# Altium PCB PCB6.PcbDoc
Units mm, origin at the board's own origin, x right, y up, seen from the top; angles counter-clockwise.
Board outline 152.4 x 101.6 mm, 2 copper layers (Top Layer, Bottom Layer); 45 components, 30 nets, 128 pads, 21 vias.
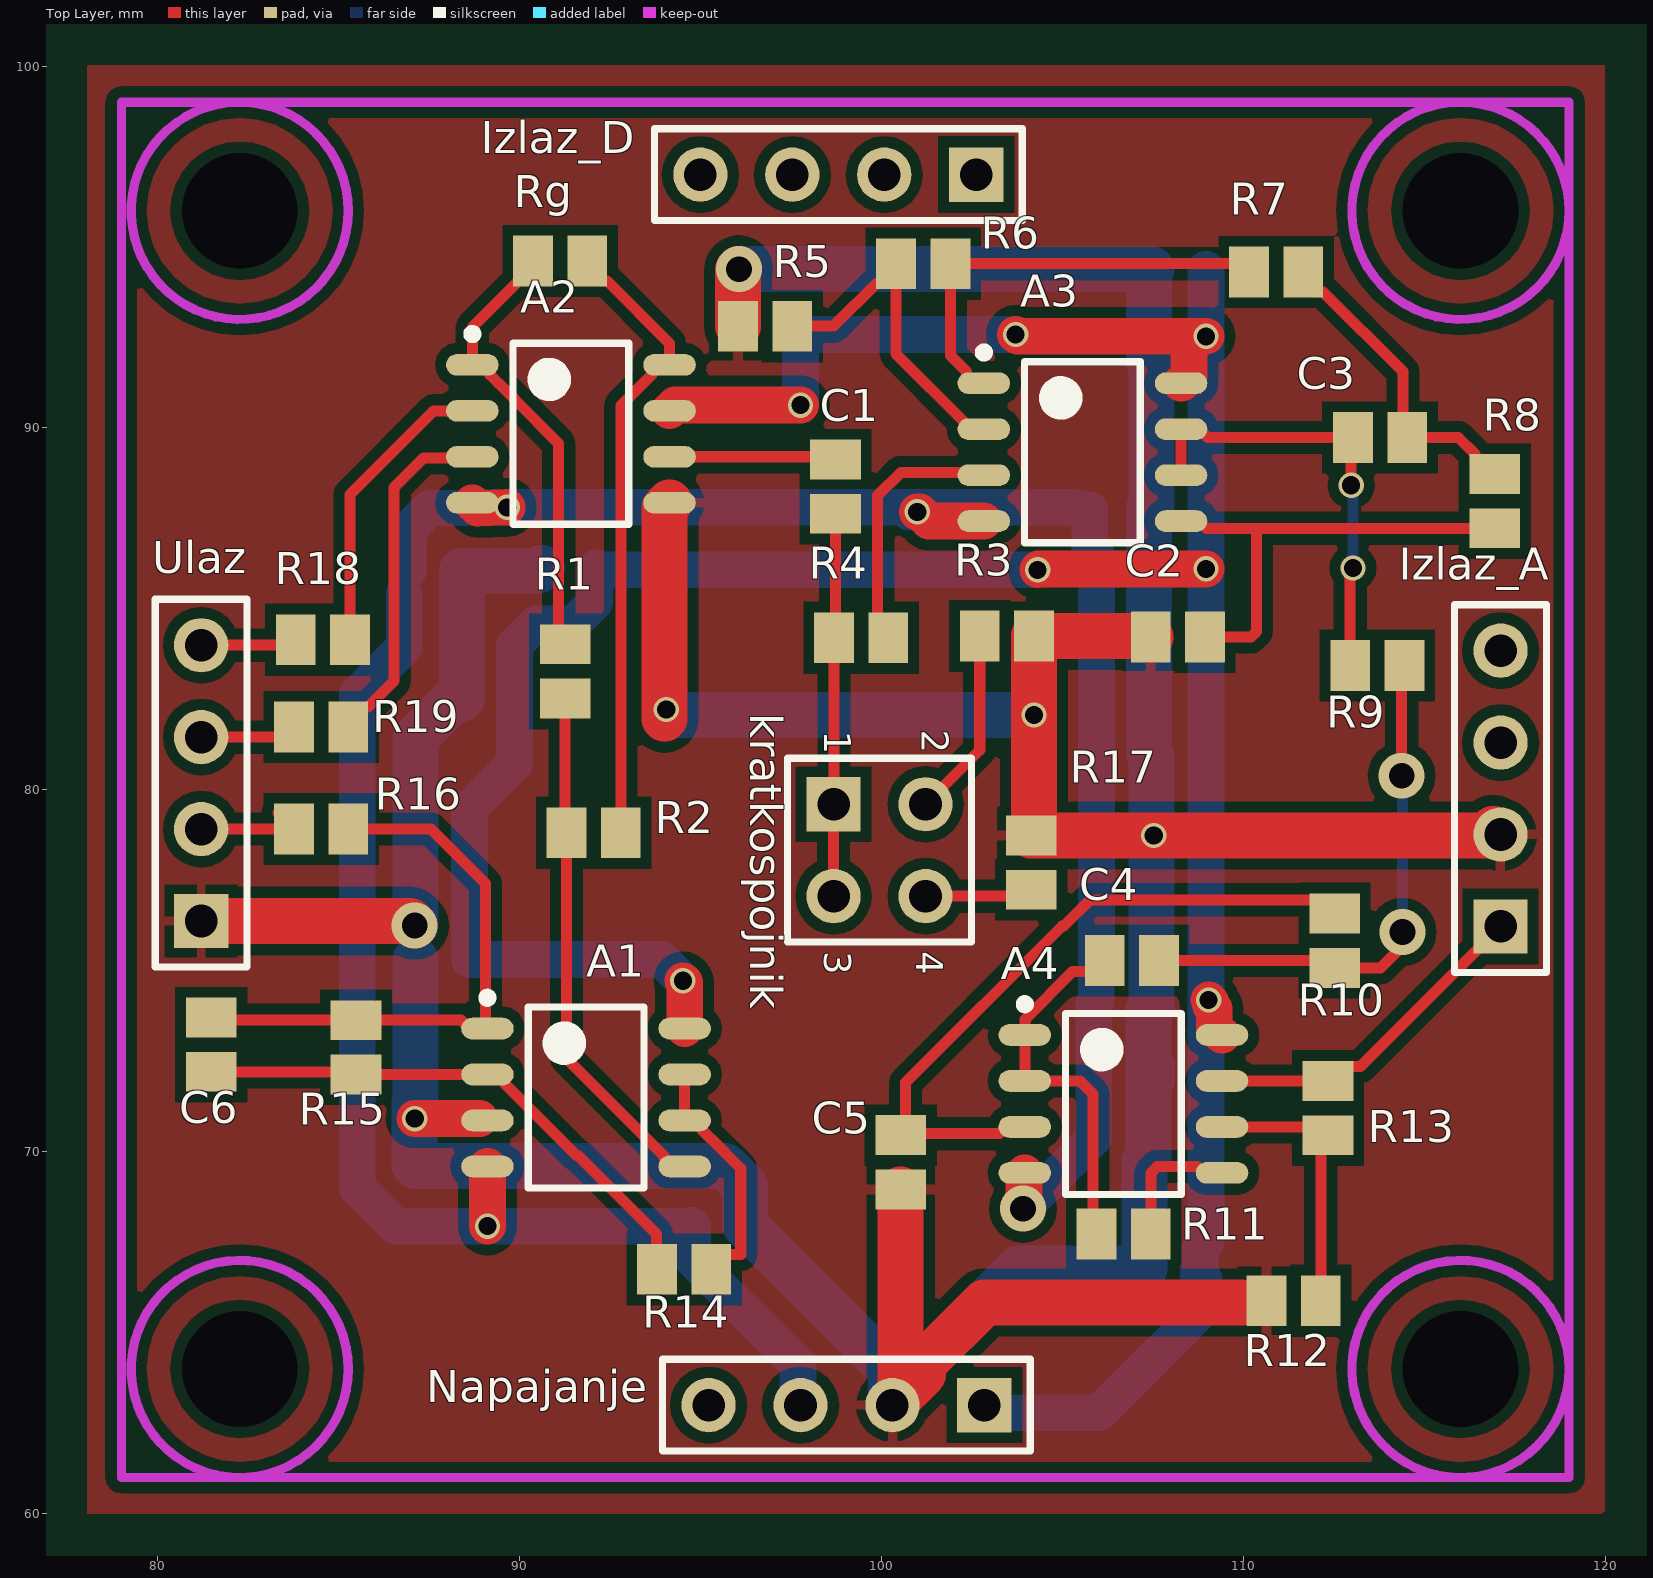
[diagram p0: Top Layer view]
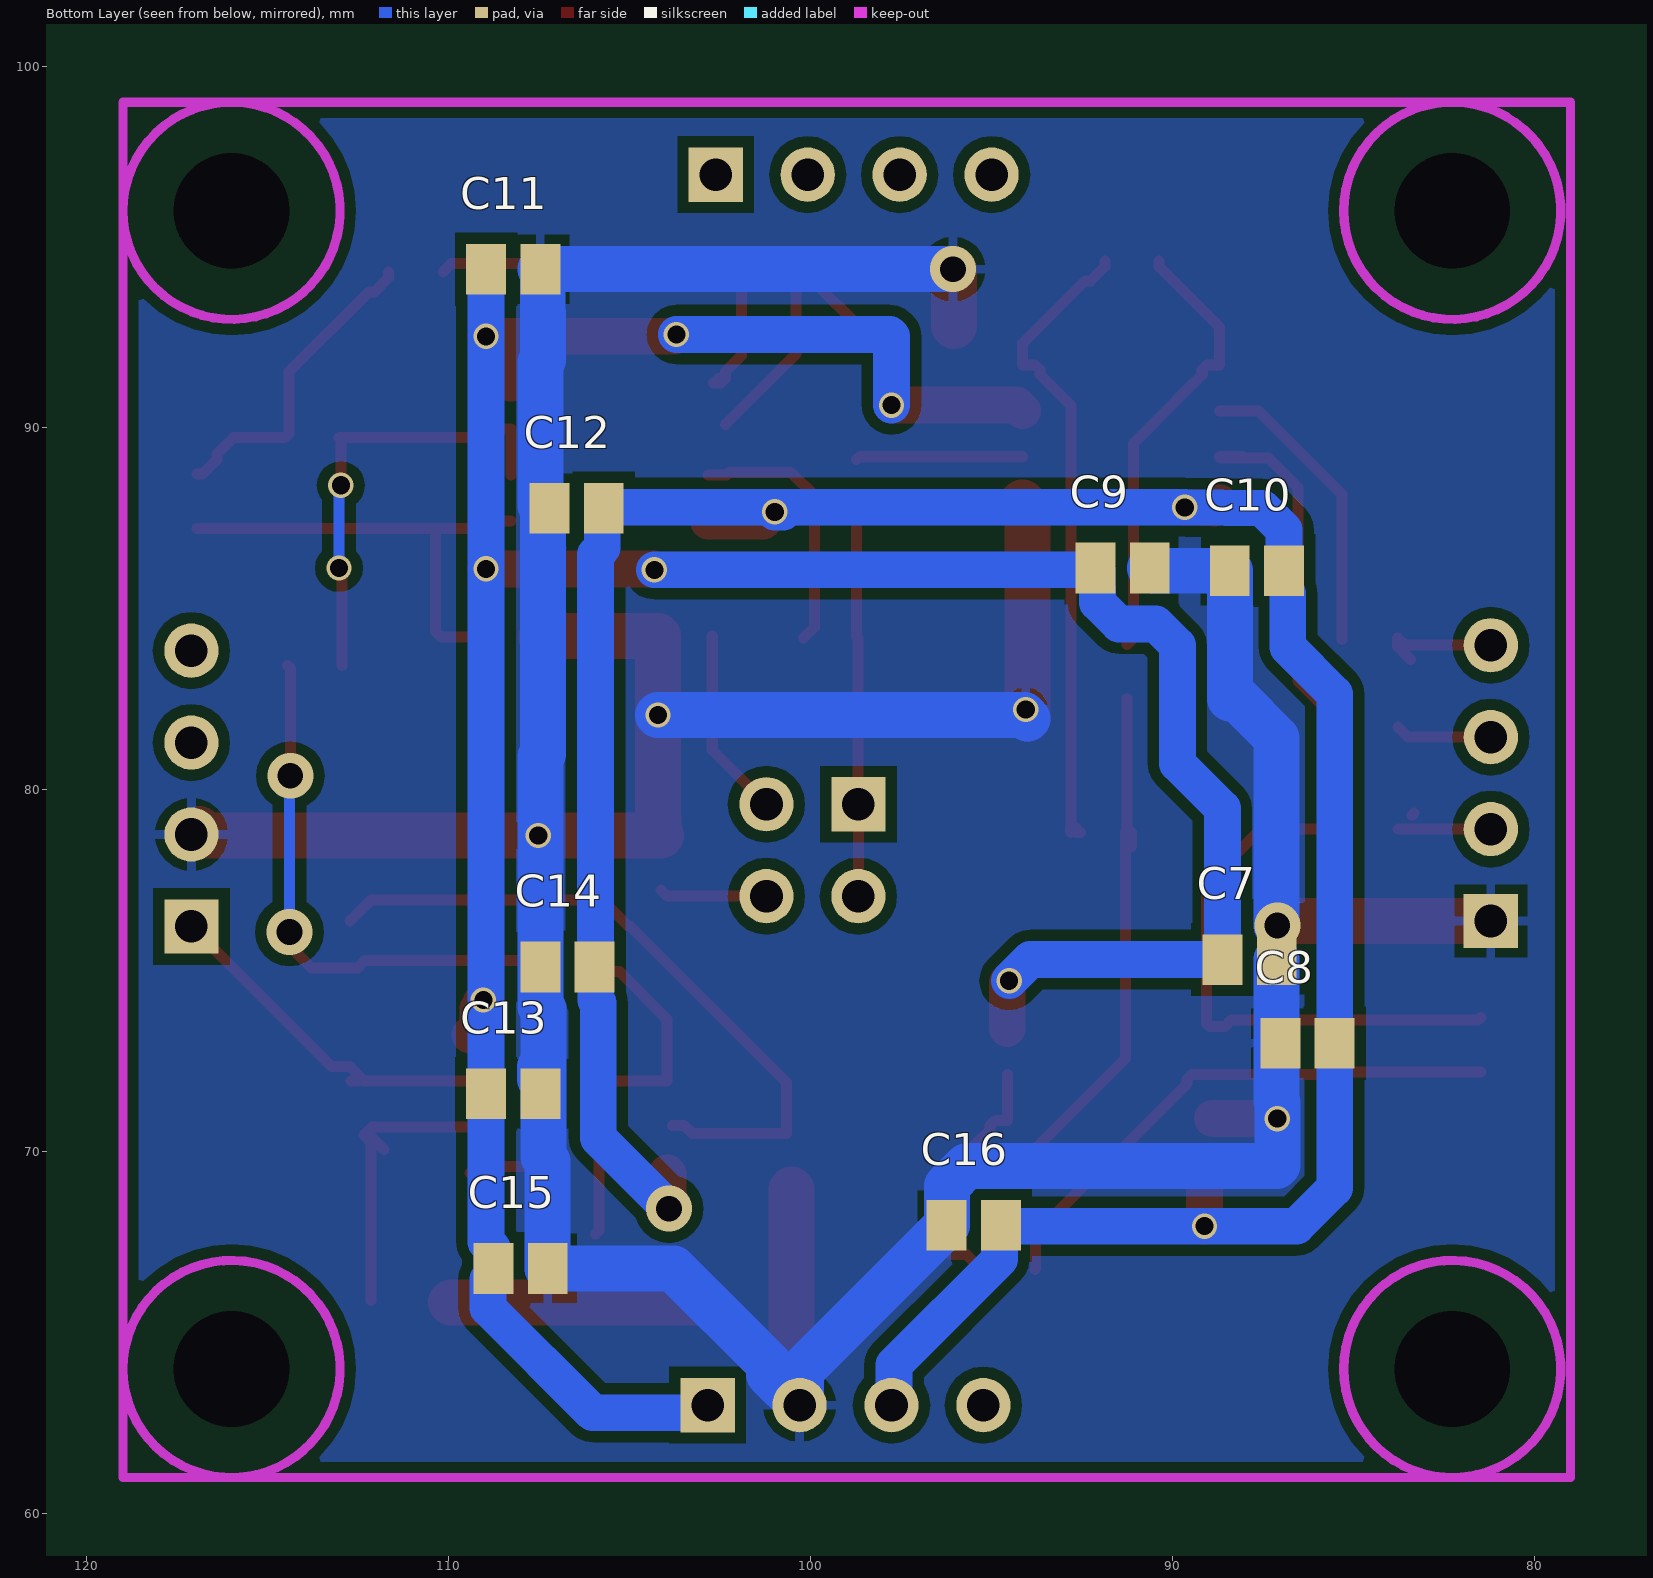
[diagram p1: Bottom Layer view, seen from below]

## Layer stack, top to bottom
Top Solder: solder mask 0.0102, Solder Resist, Dk 3.5
Top Layer: signal copper 0.0356
Dielectric 1: dielectric 0.32, FR-4, Dk 4.8
Bottom Layer: signal copper 0.0356
Bottom Solder: solder mask 0.0102, Solder Resist, Dk 3.5

## Board outline
25.4,25.4 177.8,25.4 177.8,127 25.4,127

## Design rules (kind name [scope] priority, off if disabled: settings)
Clearance [All] p1: gap=0.305 ignorepadtopadclearanceinfootprint=FALSE
HoleSize [All] p1: absolutevalues=TRUE maxlimit=3.2 minlimit=0.025 maxpercent=80.000 minpercent=20.000
MinimumSolderMaskSliver [All] p1: minsoldermaskwidth=0.102
PolygonConnect [All] p1: connectstyle=Relief reliefconductorwidth=0.254 reliefentries=4 polygonreliefangle="90 Angle" airgapwidth=0.254
RoutingVias [All] p1: holewidth=0.711 width=1.27 viastyle="Through Hole" minholewidth=0.711 minwidth=1.27 maxholewidth=0.711 maxwidth=1.27
SilkToSolderMaskClearance [IsPad] p1: minsilkscreentomaskgap=0.102 clearancetoexposedcopper=TRUE
SolderMaskExpansion [All] p1: expansion=0.102
Width [All] p1: maxlimit=1.524 minlimit=0.305 preferedwidth=0.305 minimp=50.000000 maximp=50.000000 favimp=50.000000
27 further rules are at their usual default settings.

## Classes and differential pairs
component class "shema_projekt kor4": A1 A2 A3 A4 C1 C2 C3 C4 C5 C6 Izlaz_A Izlaz_D kratkospojnik R1 R2 R3 R4 R5 R6 R7 R8 R9 R10 R11 R12 R13 R14 R15 R16 R17 R18 Rg Ulaz
component class napajanje: C7 C8 C9 C10 C11 C12 C13 C14 C15 C16 Napajanje

## Components (designator, comment, footprint, x,y, rotation, side; value= is the part's Value field where it differs from the comment)
A1 "MC33172" SOIC127P600X175-8N 108.189,60.071 r0 top
A2 "INA 118" SOIC127P600X175-8N 107.772,78.41 r0 top
A3 "OPA2277" SOIC127P600X175-8N 121.905,77.902 r0 top
A4 "OPA2277" SOIC127P600X175-8N 123.037,59.893 r0 top
C1 "3,3u" C0805 98.73,88.379 r270 top value=100pF
C2 "68n" C0805 108.191,84.226 r180 top value=100pF
C3 "470n" C0805 113.779,89.738 r0 top value=100pF
C4 "82nF" C0805 106.922,75.286 r180 top value=100pF
C5 "68n" C0805 100.533,69.711 r270 top value=100pF
C6 "68n" C0805 81.483,72.961 r270 top value=100pF
C7 "100n" C0805 87.872,75.311 r0 bottom value=100pF
C8 "100n" C0805 86.27,73 r0 bottom value=100pF
C9 "100n" C0805 91.377,86.131 r0 bottom value=100pF
C10 "100n" C0805 87.667,86.055 r0 bottom value=100pF
C11 "100n" C0805 108.216,94.386 r0 bottom value=100pF
C12 "100n" C0805 106.463,87.782 r0 bottom value=100pF
C13 "100n" C0805 108.217,71.603 r0 bottom value=100pF
C14 "100n" C0805 106.717,75.108 r0 bottom value=100pF
C15 "1u" C0805 108.014,66.777 r180 bottom
C16 "1u" C0805 95.492,67.97 r180 bottom
Izlaz_A "Input" HDR1X4 117.108,76.228 r90 top (schematic designator X2)
Izlaz_D "Input" HDR1X4 102.62,97 r180 top (schematic designator X3)
kratkospojnik "kratkospojnik" HDR2X2 98.679,79.604 r270 top (schematic designator jumper)
Napajanje "Input" HDR1X4 102.845,63 r180 top (schematic designator X4)
R1 "866k" C0805 91.262,83.273 r90 top value=1K
R2 "866k" C0805 92.05,78.816 r180 top value=1K
R3 "1M" C0805 103.468,84.252 r0 top value=1K
R4 "1k" C0805 99.441,84.201 r0 top value=1K
R5 "1k" C0805 96.787,92.812 r0 top value=1K
R6 "9k" C0805 101.156,94.539 r0 top value=1K
R7 "5k23" C0805 110.908,94.31 r0 top value=1K
R8 "6k65" C0805 116.948,87.979 r90 top value=1K
R9 "11k8" C0805 113.702,83.439 r180 top value=1K
R10 "16k9" C0805 112.522,75.832 r90 top value=1K
R11 "1k" C0805 106.693,67.73 r0 top value=1K
R12 "1k" C0805 111.391,65.888 r180 top value=1K
R13 "19k" C0805 112.339,71.208 r90 top value=1K
R14 "12k7" C0805 94.551,66.751 r0 top value=1K
R15 "866k" C0805 85.484,72.886 r270 top value=1K
R16 "499k" C0805 84.519,78.918 r180 top value=1K
R17 "100k" C0805 104.14,77.99 r90 top value=1K
R18 "100k" C0805 84.569,84.15 r180 top value=1K
R19 "100k" C0805 84.519,81.737 r0 top value=1K
Rg "12k5" C0805 91.122,94.615 r0 top value=1K
Ulaz "Input" HDR1X4 81.203,76.378 r90 top (schematic designator Input)

## Footprints (in the part's own frame and the unit in brackets; to place one, negate y for a bottom-side part, rotate by r counter-clockwise, add the part's x,y. Pads: shape width x height; smd on the part's side, far side on the other; paste and mask are expansions set on the pad)
C0805 [mm] "Chip Capacitor, Body 2.0x1.3mm, IPC High Density"
  rect 1.1x1.4 smd: 1(-0.75,0) 2(0.75,0)
  body extent -1.1,-0.72 1.1,0.72, height 1.4
HDR1X4 [mm] "Connector; Header; 4 Position"
  rect 1.5x1.5 hole 0.9: 1(0,0)
  round 1.5 hole 0.9: 2(2.54,0) 3(5.08,0) 4(7.62,0)
  silkscreen extent -1.27,-1.27 8.89,1.27
HDR2X2 [mm] "Connector; Header; 2x2 Position"
  rect 1.5x1.5 hole 0.9: 1(0,0)
  round 1.5 hole 0.9: 2(0,2.54) 3(2.54,0) 4(2.54,2.54)
  silkscreen extent -1.27,-1.27 3.81,3.81
SOIC127P600X175-8N [mm] "SOIC, 8-Leads, Body 4,90x3,90mm, Pitch 1,27mm, IPC Medium Density"
  oval 1.45x0.6 smd: 1(-19.075,13.335) 2(-19.075,12.065) 3(-19.075,10.795) 4(-19.075,9.525) 5(-13.625,9.525) 6(-13.625,10.795) 7(-13.625,12.065) 8(-13.625,13.335)
  silkscreen extent -19.2,8.93 -14.75,14.31, body extent -19.35,8.93 -13.35,13.93, height 1.75

## Part data
A1: library part OPA2333, cijena [L]=0.864, Kat.broj=2844927
A2: library part "INA 333", cijena [L]=3.64, Kat.broj=2507235
C1 C2 C3 C4 C5 C6 C7 C8 C9 C10 C11 C12 C13 C14: library part Cap, "Capacitor", LatestRevisionDate=17-Jul-2002, LatestRevisionNote="Re-released for DXP Platform.", PackageDescription="Radial Cap, Thru-Hole; 2 Leads; 0.3 in Pin Spacing", PackageReference=RAD-0.3, Published=8-Jun-2000, Publisher="Altium Limited"
  C1: cijena [L]=0.308, Kat.broj=1759412
  C2 C5 C6: cijena [L]=0.0442, Kat.broj=1759262
  C3: cijena [L]=0.112, Kat.broj=1759148
  C4: cijena [L]=0.0651, Kat.broj=1759264
  C7 C8 C9 C10 C11 C12 C13 C14: cijena [L]=0.146, Kat.broj=1301717
C15 C16: library part elko, cijena [L]=0,521, Kat.broj=1658211
Izlaz_A Izlaz_D Napajanje Ulaz: library part "Header 4H", "Header, 4-Pin, Right Angle", cijena [L]=1.38, Kat.broj=2554950, LatestRevisionDate=17-Jul-2002, LatestRevisionNote="Re-released for DXP Platform.", Publisher="Altium Limited"
kratkospojnik: library part "Header 2X2", "Header, 2-Pin, Dual row", LatestRevisionDate=17-Jul-2002, LatestRevisionNote="Re-released for DXP Platform.", Publisher="Altium Limited"
R1 R2 R3 R4 R5 R6 R7 R8 R9 R10 R11 R12 R13 R14 R15 R16 R17 R18 R19 Rg: library part Res2, "Resistor", LatestRevisionDate=17-Jul-2002, LatestRevisionNote="Re-released for DXP Platform.", PackageDescription="Axial Device, Thru-Hole; 2 Leads; 0.4 in Pin Spacing", PackageReference=AXIAL-0.4, Published=8-Jun-2000, Publisher="Altium Limited"
  R1 R2 R15: cijena [L]=0.0081, Kat.broj=2447731
  R3: cijena [L]=0.034, Kat.broj=1576507
  R4 R5 R11 R12: cijena [L]=0.0046, Kat.broj=2688819
  R6: cijena [L]=0.36, Kat.broj=1160198
  R7: cijena [L]=0.0718, Kat.broj=2312278
  R8: cijena [L]=0.0349, Kat.broj=2138965
  R9: cijena [L]=0.0268, Kat.broj=2138981
  R10: cijena [L]=0.026, Kat.broj=1652926
  R13: cijena [L]=0.026, Kat.broj=1692532
  R14: cijena [L]=0.026, Kat.broj=1469868
  R16: cijena [L]=0.0264, Kat.broj=1653008
  R17: cijena [L]=0.0015, Kat.broj=2446868
  R18 R19: cijena [L]=0.0264, Kat.broj=1469860RL
  Rg: cijena [L]=0.0138, Kat.broj=1469867
A3 A4: cijena [L]=3.69, Kat.broj=1234768

## Free pads (board coordinates)
  round 3 hole 3.2: 0(82.271,64) 0(82.271,96) 0(116,64) 0(116,96)

## Via types
v1: diameter 0.7, hole 0.5, Top Layer to Bottom Layer, 16 vias
v2: diameter 1.27, hole 0.711, Top Layer to Bottom Layer, 5 vias

## Nets (pads, with @x,y where several pads share a name; then routed paths per layer and width w, separated by ;. In a path a pad name is that pad's centre, name@x,y a point inside that pad or via, vN(x,y) a via of type N, cw(c..) or ccw(c..) an arc to the next point about the centre after c; other vN are vias at no path point)
AGND: A1.3 A2.5 C2.2 C5.2 C7.1 C8.2 C9.1 C10.2 C11.1 C12.2 C13.1 C14.2 C15.2 C16.1 Izlaz_A.2 Napajanje.2 R3.2 R5.1 R12.2 R17.2 Ulaz.1 | length 148
  Top Layer w1.016: v1(87.105,70.917) A1.3@88.897,70.917
  Top Layer w1.27: Ulaz.1 86.978,76.378 v2(87.105,76.251) ; v1@94.005,81.966 94.005,87.793 A2.5 ; R5.1 96.037,94.361 v2(96.063,94.386) ; Napajanje.2 Napajanje.2@100.305,63.009 ; C5.2 100.533,63.291 100.305,63.062 Napajanje.2@100.305,63.009 ; C2.2 107.415,84.252 R3.2 v1(104.218,82.067) 104.218,79.17 104.205,79.157 104.205,78.805 R17.2 v1(107.526,78.74) 116.718,78.74 116.896,78.918 117.046,78.768 Izlaz_A.2 ; 109.931,65.837 102.852,65.837 101.155,64.139 101.155,63.859 Napajanje.2@100.305,63.009
  Bottom Layer w1.27: C7.1 87.122,71.383 87.105,71.366 v1(87.105,70.917) 87.105,69.637 87.132,69.61 95.681,69.61 96.232,69.06 96.232,67.981 C16.1 100.261,63.952 100.261,63.044 Napajanje.2 100.305,63.009 101.155,63.859 101.155,64.139 103.792,66.777 C15.2 107.264,69.733 107.382,69.851 C13.1@107.382,71.915 ; v2@87.122,76.251 87.122,81.43 88.215,82.523 ; 88.417,82.523 C10.2 90.531,86.055 90.607,86.131 C9.1 ; v1@94.005,81.966 94.107,82.067 v1(104.218,82.067) ; v2@96.241,94.386 C11.1 107.401,94.321 107.401,93.193 107.393,93.185 107.393,91.88 107.466,91.806 107.466,87.856 107.393,87.782 107.393,80.998 107.467,80.923 C14.2 107.457,75.098 107.457,74.019 107.382,73.944 C13.1@107.382,71.915 ; 107.478,72.339 107.478,72.01 C13.1@107.382,71.915
  other v1: 94.056,82.22
NetA1_1: A1.1 C6.1 R15.1 R16.1 | length 16
  Top Layer w0.305: C6.1 81.558,73.636 R15.1 88.379,73.636 88.553,73.462 88.982,73.462 89.062,73.542 89.062,77.409 87.554,78.918 R16.1
NetA1_2: A1.2 C6.2 R14.1 R15.2 | length 15.2
  Top Layer w0.305: C6.2 85.41,72.211 R15.2 A1.2 89.459,72.136 89.596,72 89.596,71.872 89.845,71.623 89.853,71.623 91.575,69.901 91.618,69.901 93.789,67.73 93.789,66.763 R14.1
NetA1_5: A1.5 R1.1 R2.2 | length 14.8
  Top Layer w0.305: R2.2@91.134,78.435 R2.2@91.134,78.816 ; R2.2@91.217,78.899 91.262,78.945 R1.1 ; R2.2 91.3,72.581 93.992,69.889 93.992,69.823 94.219,69.596 A1.5
NetA1_6: A1.6 A1.7 R14.2 | length 6.8
  Top Layer w0.305: A1.7 A1.6 94.909,70.866 95.046,70.73 95.046,70.602 95.295,70.353 95.303,70.353 96.114,69.542 96.114,67.156 95.698,67.156 95.301,66.758 R14.2
NetA2_1: A2.1 R1.2 Rg.1 | length 12.6
  Top Layer w0.305: Rg.1 90.372,94.465 88.697,92.79 A2.1 89.042,91.745 89.178,91.608 89.178,91.481 89.427,91.232 89.435,91.232 89.879,90.788 89.879,90.78 91.084,89.576 91.084,84.202 R1.2
NetA2_2: A2.2 R18.1 | length 8.3
  Top Layer w0.305: R18.1 85.319,88.163 87.63,90.475 A2.2
NetA2_3: A2.3 R19.2 | length 10.4
  Top Layer w0.305: R19.2 85.269,81.887 85.667,82.285 85.817,82.285 86.538,83.006 86.538,88.355 87.351,89.169 88.661,89.169 A2.3 A2.3@88.071,89.205
NetA2_6: A2.6 C1.1 | length 4.6
  Top Layer w0.305: A2.6 98.654,89.205 C1.1
NetA2_8: A2.8 R2.1 Rg.2 | length 18
  Top Layer w0.305: Rg.2 91.872,94.465 92.269,94.067 92.419,94.067 94.147,92.34 A2.8 93.802,91.745 93.665,91.608 93.665,91.481 93.416,91.232 93.408,91.232 92.8,90.623 R2.1 92.825,78.842 R2.1@92.825,78.943 ; R2.1@92.546,78.816 R2.1@92.659,78.93 ; R2.1@92.659,78.816 R2.1@92.659,78.93 ; R2.1@92.673,78.943 R2.1@92.659,78.93
NetA3_1: A3.1 R6.2 R7.1 | length 12.3
  Top Layer w0.305: A3.1@102.541,91.373 102.678,91.237 102.485,91.237 102.349,91.373 102.349,91.566 101.906,92.008 R6.2 109.93,94.539 R7.1
NetA3_2: A3.2 R5.2 R6.1 | length 8.8
  Top Layer w0.305: R5.2 98.679,92.812 99.859,93.991 100.009,93.991 R6.1@100.406,94.389 ; R6.1 R6.1@100.406,94.389 ; A3.2@102.349,90.103 100.406,92.046 R6.1@100.406,94.389
NetA3_3: A3.3 R4.2 | length 7.3
  Top Layer w0.305: R4.2 99.898,84.494 99.898,88.133 100.538,88.773 102.249,88.773 102.325,88.697 A3.3
NetA3_5: A3.5 C2.1 R8.1 | length 13.1
  Top Layer w0.305: A3.5 108.785,87.427 108.983,87.229 110.363,87.229 ; C2.1 110.21,84.226 110.363,84.38 110.363,87.229 ; R8.1 110.363,87.229
NetA3_6: A3.6 A3.7 C3.1 R9.2 | length 12.5
  Top Layer w0.305: A3.6 A3.7 108.785,89.967 109.014,89.738 C3.1 112.979,89.689 v1(112.979,88.417) ; R9.2 112.952,86.054 v1(113.03,86.131)
  Bottom Layer w0.305: v1(112.979,88.417) 113.03,88.367 v1(113.03,86.131)
NetA4_1: A4.1 A4.2 C4.2 R11.1 | length 10.4
  Top Layer w0.305: R11.1 105.842,67.831 105.842,71.603 105.486,71.958 A4.2 A4.1 103.962,73.66 105.283,74.981 C4.2@106.145,74.981
NetA4_3: A4.3 C5.1 R10.2 | length 19.1
  Top Layer w0.305: A4.3@103.822,70.73 103.499,70.73 103.269,70.5 100.664,70.5 100.664,71.911 104.986,76.233 105.029,76.233 105.759,76.962 112.142,76.962 R10.2 R10.2@112.727,76.378
NetA4_5: A4.5 R11.2 | length 3.8
  Top Layer w0.305: R11.2 107.443,69.417 107.622,69.596 108.73,69.596 108.907,69.418 A4.5
NetA4_6: A4.6 R12.1 R13.1 | length 8.2
  Top Layer w0.305: A4.6 112.109,70.688 R13.1 112.141,70.26 R12.1 ; R13.1@111.792,70.061 R13.1@112.189,70.458
NetA4_7: A4.7 Izlaz_A.1 R13.2 | length 9.7
  Top Layer w0.305: A4.7 R13.2 112.733,72.352 113.232,72.352 Izlaz_A.1 ; R13.2@112.489,71.958 R13.2@112.695,71.958
NetC1_2: C1.2 kratkospojnik.1 kratkospojnik.3 R4.1 | length 10.6
  Top Layer w0.305: kratkospojnik.3 kratkospojnik.1 98.691,79.616 R4.1 98.73,84.24 C1.2
NetC3_2: C3.2 R7.2 R8.2 | length 8.8
  Top Layer w0.305: R7.2 111.658,94.16 112.056,93.763 112.206,93.763 114.414,91.555 114.414,89.853 C3.2 115.939,89.738 116.401,89.276 116.401,89.126 116.798,88.729 R8.2
NetC4_1: C4.1 R9.1 R10.1 | length 15
  Top Layer w0.305: C4.1@107.774,75.387 C4.1 112.319,75.286 R10.1 113.792,75.082 114.402,75.692 v2(114.402,76.073) ; v2(114.376,80.391) 114.376,83.363 R9.1
  Bottom Layer w0.305: v2(114.376,80.391) 114.402,80.366 v2(114.402,76.073)
NetInput_2: R16.2 Ulaz.2 | length 2.7
  Top Layer w0.305: Ulaz.2 R16.2 ; R16.2@83.325,79.362 R16.2@83.388,79.299
NetInput_3: R19.1 Ulaz.3 | length 2.7
  Top Layer w0.305: Ulaz.3 83.49,81.458 R19.1
NetInput_4: R18.2 Ulaz.4 | length 3.7
  Top Layer w0.305: Ulaz.4@81.432,84.226 Ulaz.4 83.582,83.998 83.777,84.192 83.777,83.958 R18.2@83.421,83.603
Netjumper_2: kratkospojnik.2 R3.1 | length 5.3
  Top Layer w0.305: kratkospojnik.2 102.718,81.102 R3.1
Netjumper_4: kratkospojnik.4 R17.1 | length 3
  Top Layer w0.305: kratkospojnik.4 103.964,77.064 R17.1
VCC+: A1.8 A2.7 A3.8 A4.8 C7.2 C9.2 C11.2 C13.2 C15.1 Napajanje.1 | length 92.2
  Top Layer w1.016: A2.7 94.304,90.632 v1(97.765,90.632) ; v1(94.513,74.727) 94.564,74.676 A1.8 ; v1(103.708,92.583) 103.759,92.532 v1(108.967,92.532) ; v1(104.318,86.081) 104.343,86.106 v1(108.967,86.106) ; A3.8 108.289,91.237 108.497,91.445 108.497,91.993 ; v1(109.042,74.193) 109.091,74.145 109.091,74.055 109.195,73.951 109.195,73.436 109.403,73.228 A4.8
  Bottom Layer w1.016: v1(94.513,74.727) 93.929,75.311 C7.2 88.622,79.488 89.865,80.731 89.865,83.987 90.46,84.582 91.477,84.582 92.075,85.18 92.075,85.548 92.085,85.558 92.085,86.089 C9.2 92.127,86.123 92.169,86.081 v1(104.318,86.081) ; v1(97.765,90.632) 97.765,92.532 97.815,92.583 v1(103.708,92.583) ; Napajanje.1 103.056,62.789 106.02,62.789 108.915,65.684 108.915,66.476 108.764,66.627 C15.1 108.806,66.819 108.806,67.35 108.967,67.511 C13.2 v1(108.967,86.106) v1(108.967,92.532) 108.966,92.534 C11.2
VCC-: A1.4 A2.4 A3.4 A4.4 C8.1 C10.1 C12.1 C14.1 C16.2 Napajanje.3 | length 79.4
  Top Layer w1.016: A2.4 88.849,87.782 v1(89.662,87.808) ; v1(89.114,67.945) A1.4 ; v1(100.99,87.681) 101.059,87.681 101.313,87.427 A3.4 ; v2(103.911,68.428) 103.937,68.453 103.937,69.393 A4.4
  Bottom Layer w1.016: C10.1@86.817,85.423 86.817,83.947 85.52,82.65 C8.1 85.52,69 86.575,67.945 v1(89.114,67.945) 94.717,67.945 C16.2 94.784,67.928 94.784,67.029 97.697,64.116 97.697,63.068 Napajanje.3 ; C10.1 86.917,87.187 87.513,87.782 v1(89.662,87.808) 100.635,87.808 ; v1(100.99,87.681) 100.762,87.681 100.635,87.808 ; v2(103.911,68.428) 105.867,70.383 105.867,74.117 105.935,74.185 105.935,75.075 C14.1 105.945,75.13 105.945,86.501 105.755,86.69 105.755,87.74 105.708,87.748 105.307,87.808 100.635,87.808
pads on no net: Izlaz_A.3 Izlaz_A.4 Izlaz_D.1 Izlaz_D.2 Izlaz_D.3 Izlaz_D.4 Napajanje.4

## Polygon pours and split planes (outlines as drawn)
AGND on Top Layer "Top Layer-AGND" (solid, pour order 6): 78.003,100.025 119.99,100.025 119.99,59.995 119.939,59.944 119.888,59.995 78.054,59.995 78.054,99.974
AGND on Bottom Layer "Bottom Layer-No Net" (solid, remove dead copper, pour order 8): 78.054,99.924 78.156,99.822 120.015,99.822 120.015,60.046 119.913,59.944 119.659,60.198 77.953,60.198 77.953,99.771 78.054,99.873

## Keep-outs
Keep-Out Layer:
  circle w0.254: c116,64 r3
  circle w0.254: c82.271,64 r3
  circle w0.254: c116,96 r3
  circle w0.254: c82.271,96 r3
  lines w0.254: 79,61 79,99 119,99 119,61 79,61

## Silkscreen, mask and mechanical layers (free items; w line width, h text height)
Mechanical 1:
  lines w0.254: 78,60 120,60 120,100 78,100 78,60

## Text inside footprints (layer, text, board x,y; h text height)
kratkospojnik: Top Overlay "3" at 98.171,75.54 h1.27 r270; Top Overlay "4" at 100.711,75.54 h1.27 r270; Top Overlay "2" at 100.863,81.661 h1.27 r270; Top Overlay "1" at 98.171,81.636 h1.27 r270